# Altium PCB carte_balise_v100.PcbDoc
Units mil, origin at the board's own origin, x right, y up, seen from the top; angles counter-clockwise.
Board outline 3149.8 x 3149.8 mil, 2 copper layers (Top, Bottom), stack 61.811 mil thick; 87 components, 105 nets, 385 pads, 41 vias.
Unrouted connection lines stored in the file: 108.
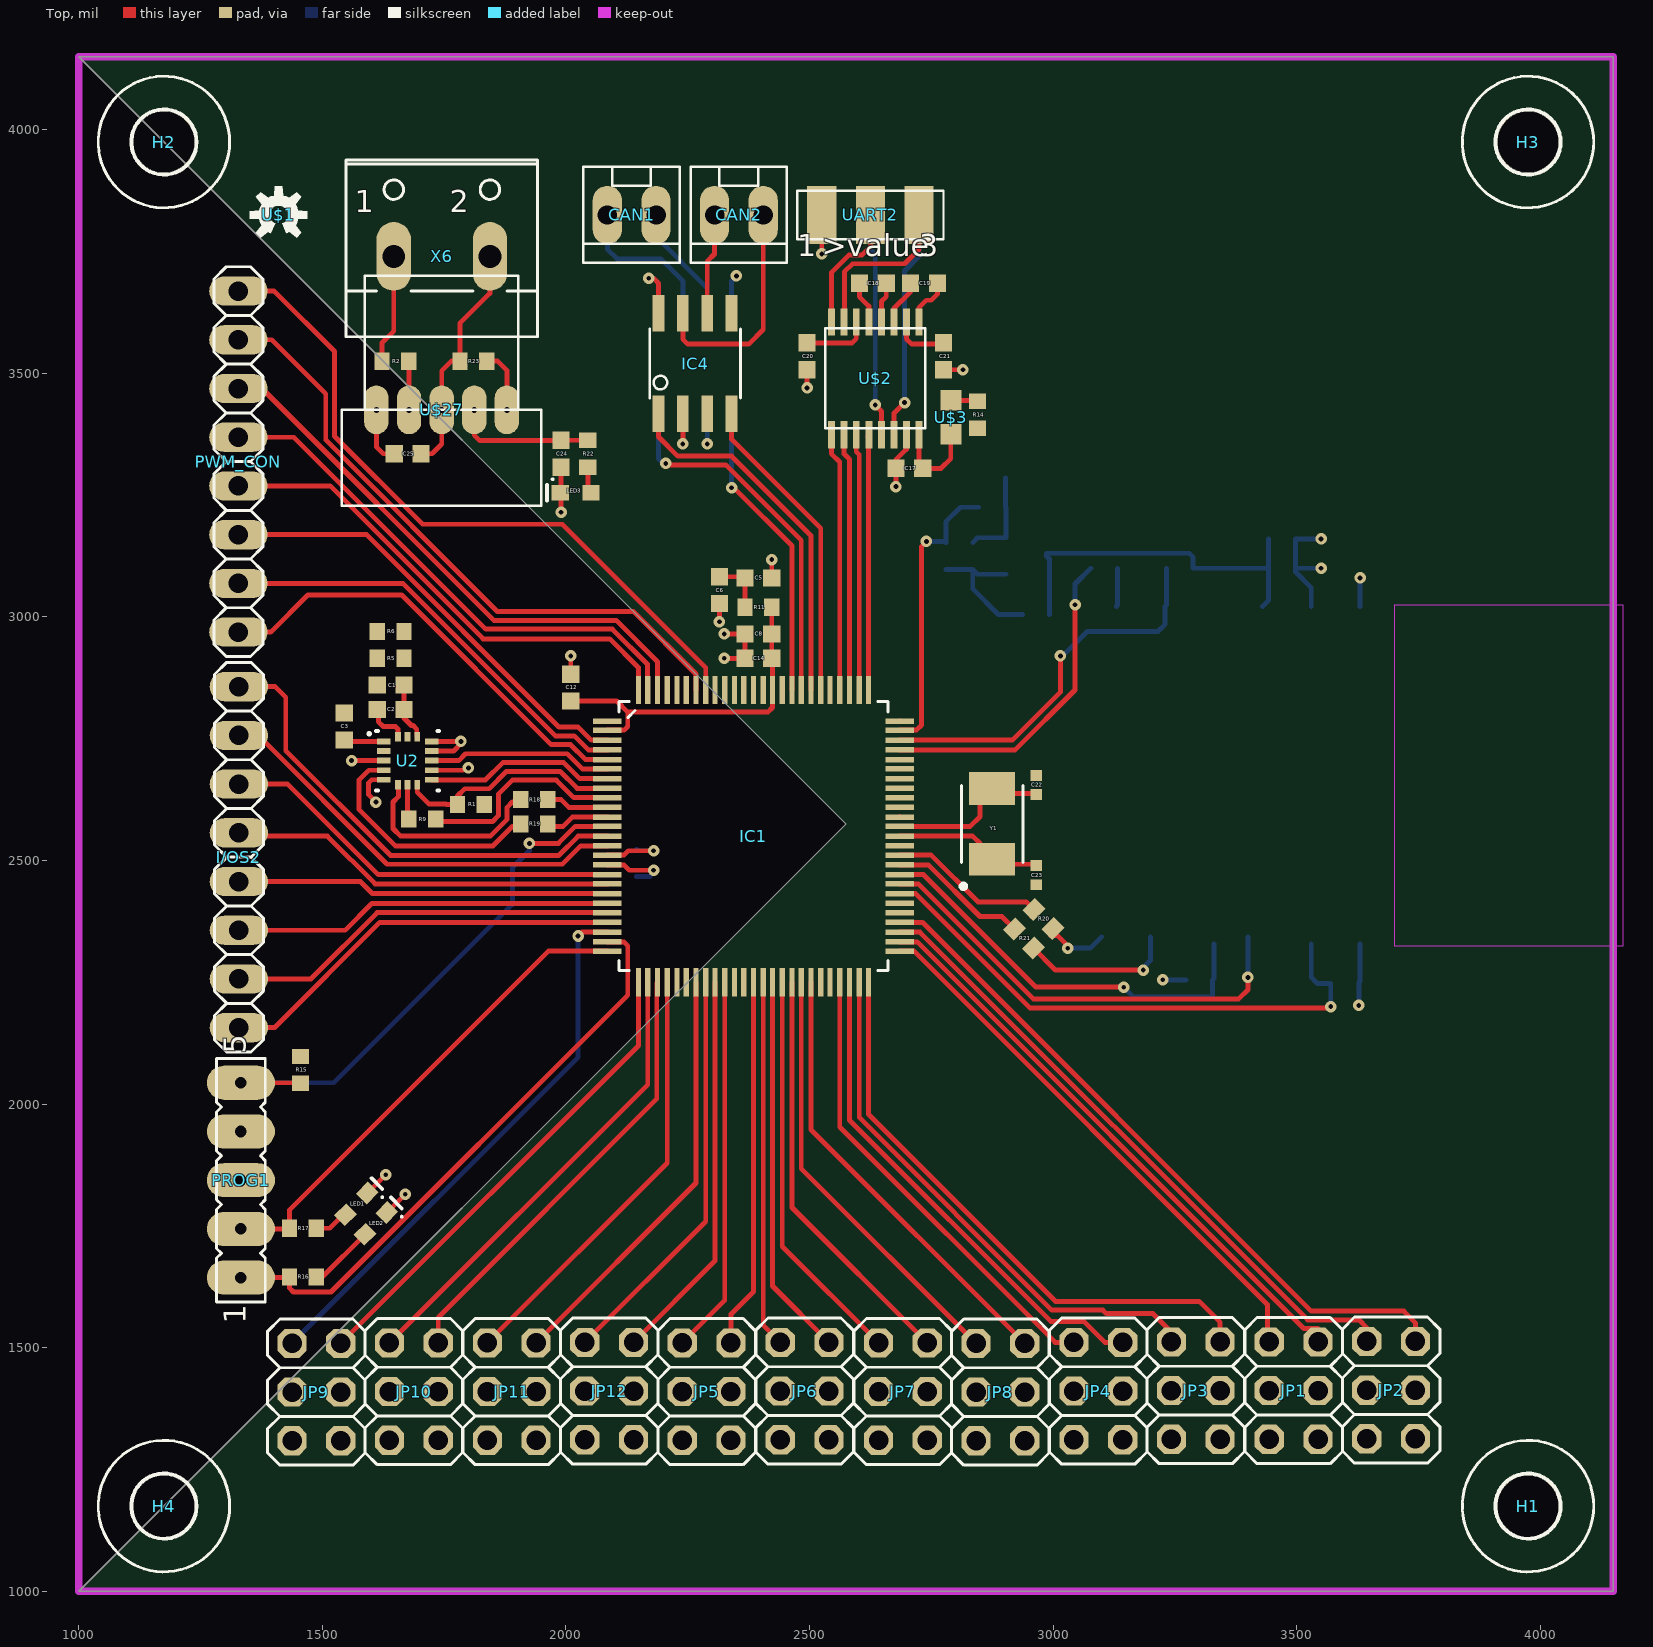
[diagram p0: Top view]
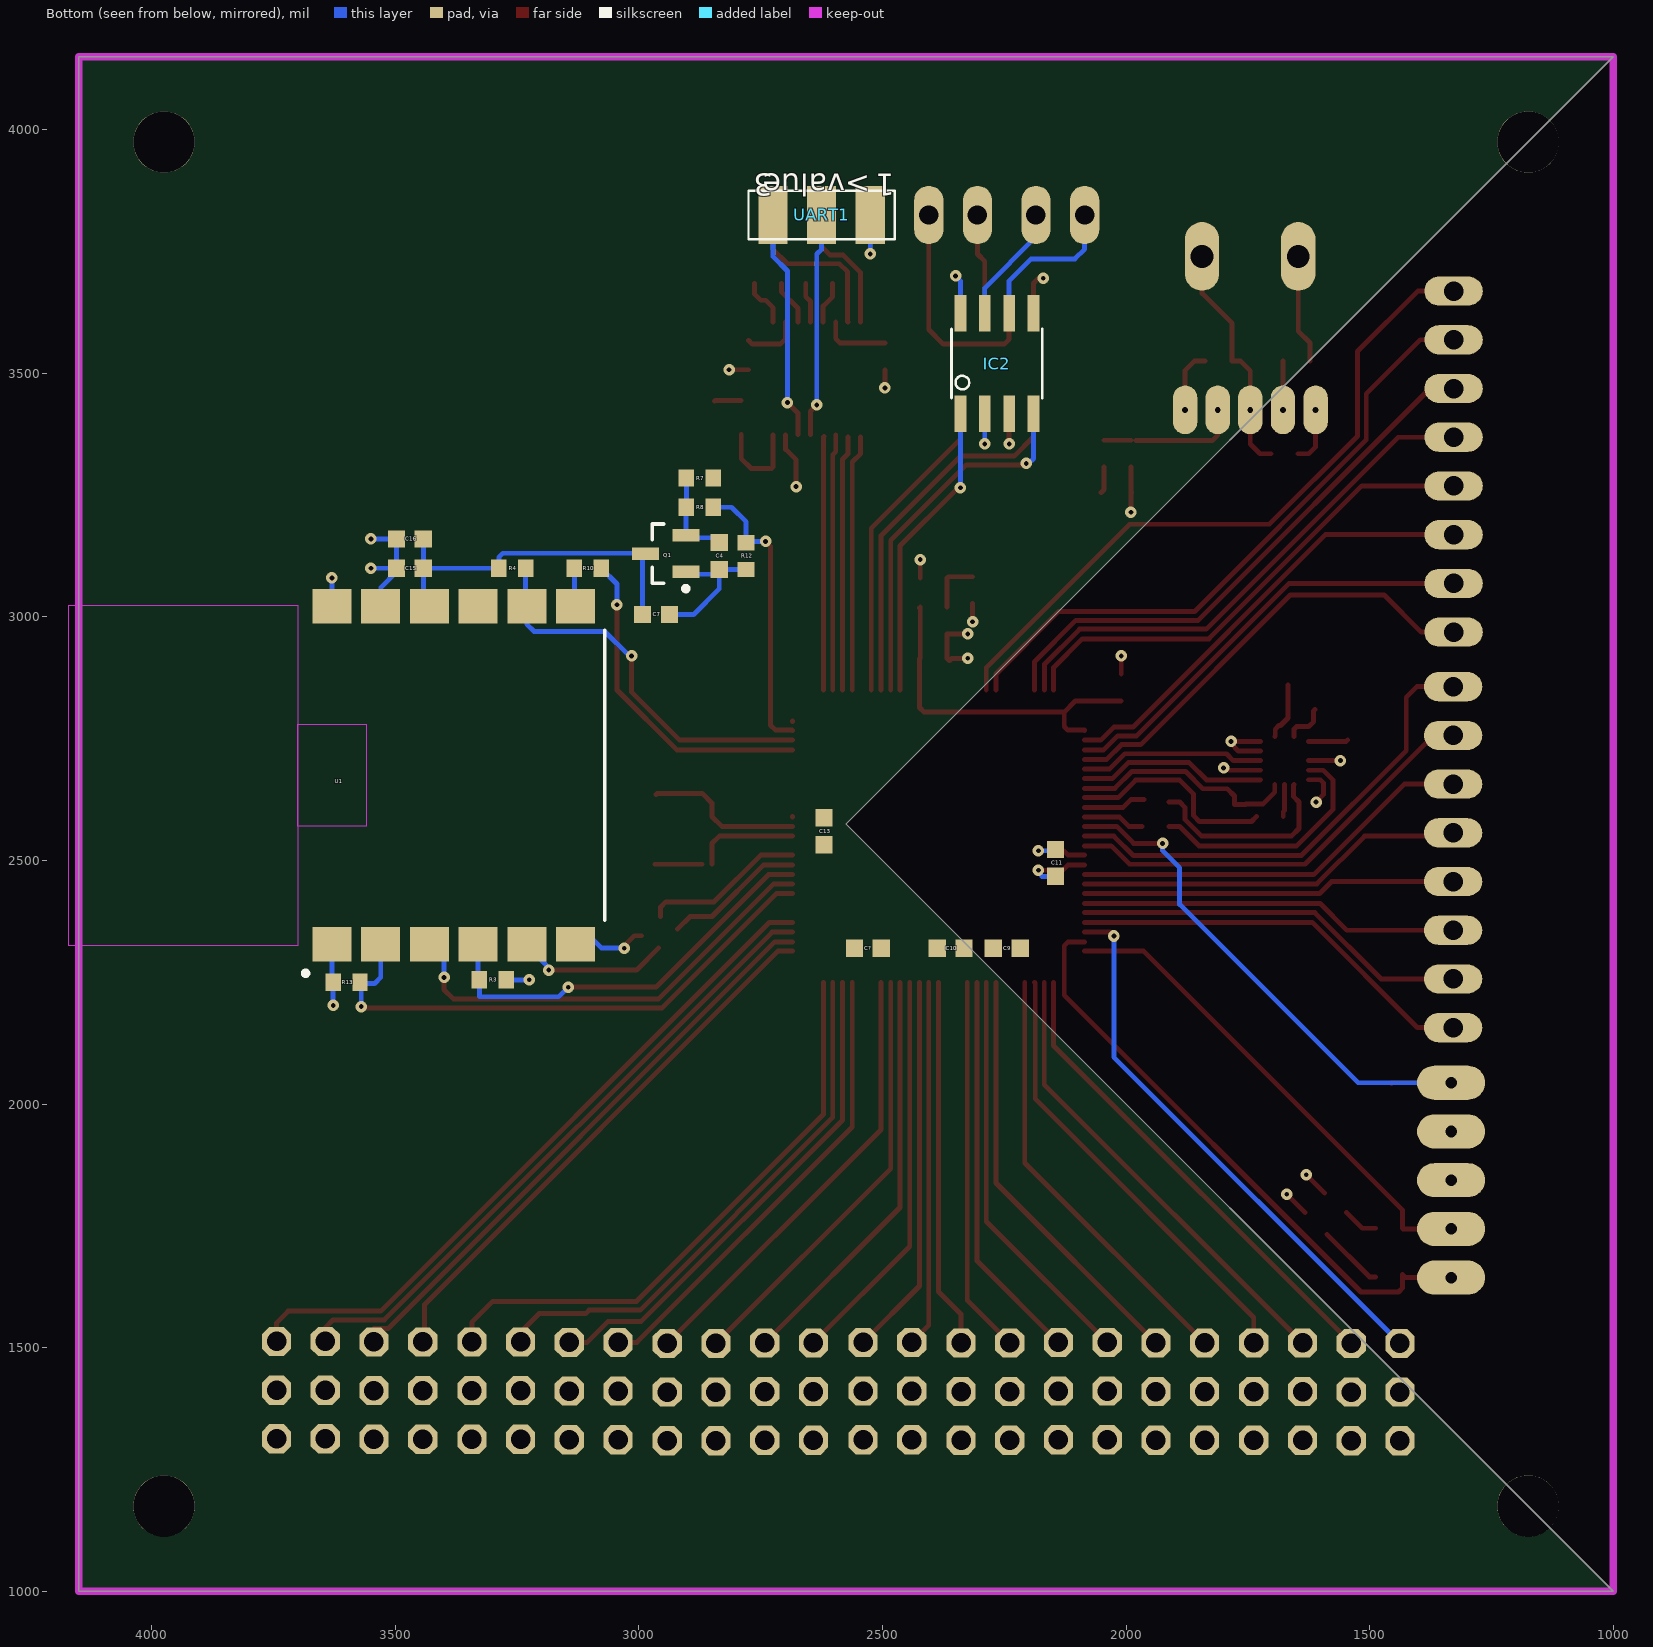
[diagram p1: Bottom view, seen from below]

## Layer stack, top to bottom
Top Solder: solder mask 0.4, Solder Resist, Dk 3.5
Top: signal copper 1.378
Dielectric 1: core 59.0551, FR-4, Dk 4.8
Bottom: signal copper 1.378
Bottom Solder: solder mask 0.4, Solder Resist, Dk 3.5

## Board outline
1000,1000 4149.8,1000 4149.8,4149.8 1000,4149.8 2574.8,2574.8

## Design rules (kind name [scope] priority, off if disabled: settings)
Clearance mdViaVia [IsVia vs IsVia] p1: gap=8
Clearance mdPadVia [IsPad vs IsVia] p2: gap=8
Clearance mdPadPad [IsPad vs IsPad] p3: gap=8
Clearance mdWireVia [(InLayerClass('Signal Layers') AND IsTrack) vs IsVia] p4: gap=8
Clearance mdWirePad [(InLayerClass('Signal Layers') AND IsTrack) vs IsPad] p5: gap=8
Clearance mdWireWire [(InLayerClass('Signal Layers') AND IsTrack) vs (InLayerClass('Signal Layers') AND IsTrack)] p6: gap=8
Clearance [All] p7: gap=8
HoleSize [All] p1: absolutevalues=TRUE maxlimit=100000 minlimit=24 maxpercent=80.000 minpercent=20.000
HoleToHoleClearance [All] p1: gap=8 allowstackedmicrovias=TRUE
PolygonConnect ThermalVias [IsVia] p1: connectstyle=Direct reliefconductorwidth=10 reliefentries=4 polygonreliefangle="90 Angle" airgapwidth=10
PolygonConnect [All] p2: connectstyle=Relief reliefconductorwidth=10 reliefentries=4 polygonreliefangle="90 Angle" airgapwidth=10
RoomDefinition carte_balise_v100 [InComponentClass('carte_balise_v100')] p1: confinementstyle=ConfineIn formatcopy=TRUE lockcomponents=FALSE outline 0,0 2000,0 2000,1000 0,1000
RoutingVias [All] p1: holewidth=28 width=50 viastyle="Through Hole" minholewidth=28 minwidth=50 maxholewidth=28 maxwidth=50
SilkToSilkClearance [All] p1 off: silktosilkclearance=10
SilkToSolderMaskClearance [IsPad] p1 off: minsilkscreentomaskgap=10 clearancetoexposedcopper=TRUE
SolderMaskExpansion [All] p1: expansion=4
Width [All] p1: maxlimit=100000 minlimit=10 preferedwidth=10
26 further rules are at their usual default settings.

## Components (designator, comment, footprint, x,y, rotation, side; value= is the part's Value field where it differs from the comment)
C1 "100n/0603" SMD_CA_0603_HD 1640,2860 r180 top
C2 "100n/0603" SMD_CA_0603_HD 1640,2810 r180 top
C3 "100n/0603" SMD_CA_0603_HD 1545,2775 r270 top
C4 "100n/0603" SMD_CA_0603_HD 2835,3125 r270 bottom
C5 "100n/0603" SMD_CA_0603_HD 2395,3080 r0 top
C6 "10u/6V3/0603" SMD_CA_0603_HD 2315,3055 r90 top
C7 "470n/16V/0603" SMD_CA_0603_HD 2965,3005 r180 bottom
C8 "100n/0603" SMD_CA_0603_HD 2395,2965 r0 top
C9 "100n/0603" SMD_CA_0603_HD 2245,2320 r180 bottom
C10 "100n/0603" SMD_CA_0603_HD 2360,2320 r0 bottom
C11 "100n/0603" SMD_CA_0603_HD 2145,2495 r270 bottom
C12 "100n/0603" SMD_CA_0603_HD 2010,2855 r270 top
C13 "100n/0603" SMD_CA_0603_HD 2620,2560 r270 bottom
C14 "100n/0603" SMD_CA_0603_HD 2395,2915 r0 top
C15 "100n/0603" SMD_CA_0603_HD 3470,3100 r0 bottom
C16 "10u/6V3/0603" SMD_CA_0603_HD 3470,3160 r180 bottom
C17 "100n/0603" SMD_CA_0603_HD 2705,3305 r0 top
C18 "100n/0603" SMD_CA_0603_HD 2630,3685 r0 top
C19 "100n/0603" SMD_CA_0603_HD 2735,3685 r0 top
C20 "100n/0603" SMD_CA_0603_HD 2495,3535 r90 top
C21 "100n/0603" SMD_CA_0603_HD 2775,3535 r90 top
C22 "22p/0402" SMD_CA_0402_HD 2965,2655 r90 top
C23 "22p/0402" SMD_CA_0402_HD 2965,2470 r270 top
C24 "4.7u/16V/0603" SMD_CA_0603_HD 1990,3335 r90 top
C25 "4.7u/16V/0603" SMD_CA_0603_HD 1675,3335 r180 top
C? "100n/0603" SMD_CA_0603_HD 2530,2320 r0 bottom
CAN1 "CONNECT_CAN" CONNECT_CAN 2135,3825 r90 top
CAN2 "CONNECT_CAN" CONNECT_CAN 2355,3825 r90 top
H1 "MOUNT-HOLE3.2" 3,2 3974.8,1174.8 r0 top
H2 "MOUNT-HOLE3.2" 3,2 1174.8,3974.8 r0 top
H3 "MOUNT-HOLE3.2" 3,2 3974.8,3974.8 r0 top
H4 "MOUNT-HOLE3.2" 3,2 1174.8,1174.8 r0 top
I/OS2 "PINHD-1X08_2.54" 1X08 1328.8,2506.8 r270 top
IC1 "DSPIC33EP512MU810-X_PF" TQFP100_14X14MC 2385,2550 r0 top
IC2 "MCP2551/SN" SO08 2265,3520 r180 bottom
IC4 "MCP2551/SN" SO08 2265,3520 r0 top
JP1 "PINHD-2X3" 2X03 3493.8,1411.8 r270 top
JP2 "PINHD-2X3" 2X03 3693.8,1412.8 r270 top
JP3 "PINHD-2X3" 2X03 3292.8,1411.8 r270 top
JP4 "PINHD-2X3" 2X03 3092.8,1410.8 r270 top
JP5 "PINHD-2X3" 2X03 2288.8,1409.8 r270 top
JP6 "PINHD-2X3" 2X03 2489.8,1410.8 r270 top
JP7 "PINHD-2X3" 2X03 2691.8,1409.8 r270 top
JP8 "PINHD-2X3" 2X03 2891.8,1408.8 r270 top
JP9 "PINHD-2X3" 2X03 1487.8,1408.8 r270 top
JP10 "PINHD-2X3" 2X03 1687.8,1409.8 r270 top
JP11 "PINHD-2X3" 2X03 1888.8,1409.8 r270 top
JP12 "PINHD-2X3" 2X03 2088.8,1410.8 r270 top
LED1 "0603" SDM_LED_0603 1570,1795 r45 top
LED2 "0603" SDM_LED_0603 1610,1755 r45 top
LED3 "0603" SDM_LED_0603 2020,3255 r180 top
PROG1 "FE05-1" FE05-1 1332.8,1843.8 r90 top
PWM_CON "PINHD-1X08_2.54" 1X08 1327.8,3318.8 r270 top
Q1 "DMP2035" SMD_TR_SOT23-3 2945,3130 r0 bottom
R1 "100k/0603" SMD_RE_0603_HD 1805,2615 r0 top
R2 "0R/0603" SMD_RE_0603_HD 1650,3525 r0 top
R3 "100k/0603" SMD_RE_0603_HD 3300,2255 r180 bottom
R4 "100k/0603" SMD_RE_0603_HD 3260,3100 r0 bottom
R5 "10R/0603" SMD_RE_0603_HD 1640,2915 r180 top
R6 "NE / 0603" SMD_RE_0603_HD 1640,2970 r180 top
R7 "0R/0603" SMD_RE_0603_HD 2875,3285 r180 bottom
R8 "10M/0603" SMD_RE_0603_HD 2875,3225 r180 bottom
R9 "33R/0603" SMD_RE_0603_HD 1705,2585 r180 top
R10 "33R/0603" SMD_RE_0603_HD 3105,3100 r0 bottom
R11 "10R/0603" SMD_RE_0603_HD 2395,3020 r180 top
R12 "100k/0603" SMD_RE_0603_HD 2780,3125 r90 bottom
R13 "10M/0603" SMD_RE_0603_HD 3600,2250 r180 bottom
R14 "0R/0603" SMD_RE_0603_HD 2845,3415 r270 top
R15 "10k/0603" SMD_RE_0603_HD 1455,2070 r90 top
R16 "100k/0603" SMD_RE_0603_HD 1460,1645 r180 top
R17 "100k/0603" SMD_RE_0603_HD 1460,1745 r180 top
R18 "33R/0603" SMD_RE_0603_HD 1935,2625 r0 top
R19 "33R/0603" SMD_RE_0603_HD 1935,2575 r0 top
R20 "33R/0603" SMD_RE_0603_HD 2980,2380 r315 top
R21 "33R/0603" SMD_RE_0603_HD 2940,2340 r315 top
R22 "330R/0603" SMD_RE_0603_HD 2045,3335 r90 top
R23 "79.3k/0603" SMD_RE_0603_HD 1810,3525 r0 top
U1 "MRF24J40MAT-I/RM" "SMD_MRF24J40MA -tight" 3700,2675 r90 bottom
U2 "ADXL362" SMD_IC_LGA_16 1675,2705 r0 top
U$1 "OSHW-LOGOS" OSHW-LOGO-S 1410,3825 r0 top
U$2 "SN75C3232_PW" PW16 2635,3490 r180 top
U$3 "L_603" 0603 2790,3410 r270 top
U$27 "PTR08100W" PTR08100W 1745,3425 r180 top
UART1 "CONNECT_3PINS_CMS" CON_2.54_3 2625,3825 r90 bottom
UART2 "CONNECT_3PINS_CMS" CON_2.54_3 2625,3825 r270 top
X6 "+12V" W237-102 1745,3790 r0 top
Y1 "TXC-7A-12MHz" SMD_OSC_5X3.2_2PINS 2875,2575 r90 top

## Footprints (in the part's own frame and the unit in brackets; to place one, negate y for a bottom-side part, rotate by r counter-clockwise, add the part's x,y. Pads: shape width x height; smd on the part's side, far side on the other; paste and mask are expansions set on the pad)
1X08 [mil] "1X08"
  oval 60x120 hole 40: 1(-350,0) 2(-250,0) 3(-150,0) 4(-50,0) 5(50,0) 6(150,0) 7(250,0) 8(350,0)
  silkscreen extent -400,-50 400,50
2X03 [mil] "2X03"
  oct 60x60 hole 40: 1(-100,-50) 2(-100,50) 3(0,-50) 4(0,50) 5(100,-50) 6(100,50)
  silkscreen extent -150,-100 150,100
3,2 [mil] "3,2"
  round 126 hole 126: 1(0,0)
  silkscreen extent -135,-135 135,135
0603 [mil] "0603"
  rect 42x43 smd: 1(-34.45,0) 2(35,0)
CON_2.54_3 [mil] "CON_2.54_3"
  rect 120x60 smd: P$1(0,-100) P$2(0,0) P$3(0,100)
  silkscreen extent -50,-150 50,150
CONNECT_CAN [mil] "CONNECT_CAN"
  oval 120x60 hole 40: _H(0,-50) _L(0,50)
  silkscreen extent -98,-98 99,99
FE05-1 [mil] "FE05-1"
  oval 70x140 hole 24: 1(-200,0) 2(-100,0) 3(0,0) 4(100,0) 5(200,0)
  silkscreen extent -250,-50 250,50
OSHW-LOGO-S [mil] "OSHW-LOGO-S"
  silkscreen extent -59,-47 59,59
PTR08100W [mil] "PTR08100W"
  oval 50x100 hole 12: P$1(134,0) P$2(67,0) P$3(0,0) P$4(-66.93,0) P$5(-133.86,0)
  silkscreen extent -205,-276 205,197
PW16 [mil] "PW16"
  rect 14x56 smd: P$1(-89.57,-115.16) P$2(-63.98,-115.16) P$3(-38.39,-115.16) P$4(-12.8,-115.16) P$5(13,-115.16) P$6(39,-115.16) P$7(64,-115.16) P$8(90,-115.16) P$9(90,116) P$10(64,116) P$11(39,116) P$12(13,116) P$13(-12.8,116) P$14(-38.39,116) P$15(-63.98,116) P$16(-89.57,116)
  silkscreen extent -102,-102 103,103
SDM_LED_0603 [mm] "LED 2-Leads, Body 1,70x0,80mm, IPC High Density"
  rect 0.9x0.8 smd: 1(-0.8,0) 2(0.8,0)
  silkscreen extent 1.15,-0.75 1.5,0.4, body extent -0.9,-0.45 0.9,0.45, height 0.68
SMD_CA_0402_HD [mm] "Chip Capacitor, 2-Leads, Body 1,00x0,50mm, IPC High Density"
  rect 0.56x0.6 smd: 1(-0.5,0) 2(0.5,0)
  body extent -0.53,-0.28 0.53,0.27, height 0.55
SMD_CA_0603_HD [mm] "Chip Capacitor, 2-Leads, Body 1,60x0,80mm, IPC High Density"
  rect 0.9x0.9 smd: 1(-0.7,0) 2(0.7,0)
  body extent -0.85,-0.45 0.85,0.45, height 0.9
SMD_IC_LGA_16 [mm] "LGA, 16-Leads, Body 3.22x3.00mm, Pitch 0.50mm, IPC High Density"
  rect 0.7x0.3 smd: 1(-1.25,1) 2(-1.25,0.5) 3(-1.25,0) 4(-1.25,-0.5) 5(-1.25,-1) 9(1.25,-1) 10(1.25,-0.5) 11(1.25,0) 12(1.25,0.5) 13(1.25,1)
  rect 0.3x0.5 smd: 6(-0.5,-1.25) 7(0,-1.25) 8(0.5,-1.25) 14(0.5,1.25) 15(0,1.25) 16(-0.5,1.25)
  silkscreen extent -2.07,-1.55 1.65,1.55, body extent -1.65,-1.55 1.65,1.55, height 1.14
"SMD_MRF24J40MA -tight" [mil] "SM Module; 12 Leads; Body 27.9x17.8x1.7mm (LxWxH), Microchip"
  rect 70.87x80 smd mask+2: 1(-346.46,-70) 2(-346.46,-170) 3(-346.46,-270) 4(-346.46,-370) 5(-346.46,-470) 6(-346.46,-570) 7(346.46,-570) 8(346.46,-470) 9(346.46,-370) 10(346.46,-270) 11(346.46,-170) 12(346.46,-70)
  Top keep-out region: -105,0 105,0 105,-140 -105,-140
  Keep-Out Layer region: -350.39,470.47 349.41,470.47 349.41,0 -350.39,0
  silkscreen extent -411,-630 298,-11, body extent -350,-630 350,470, height 67
SMD_OSC_5X3.2_2PINS [mm] "2-pin, 5x3.2mm smd"
  rect 1.7x2.4 smd: 1(-1.85,0) 2(1.85,0)
  Document keep-out lines w0.1: -2.5,1.6 2.5,1.6
  silkscreen extent -3.37,-1.6 2.01,1.62, body extent -2.5,-1.6 2.5,1.6, height 1.35
SMD_RE_0603_HD [mm] "Chip Resistor, 2-Leads, Body 1,57x0,85mm, IPC High Density"
  rect 0.8x0.9 smd: 1(-0.7,0) 2(0.7,0)
  body extent -0.83,-0.48 0.82,0.48, height 0.5
SMD_TR_SOT23-3 [mm] "SOT23, 3-Leads, Body 3.1x2.7mm (max), Pitch 0,95mm"
  rect 1.4x0.65 smd: 1(-1.05,0.95) 2(-1.05,-0.95) 3(1.05,0)
  silkscreen extent -1.17,-1.55 0.7,1.95, body extent -1.24,-1.45 1.24,1.47, height 1
SO08 [mil] "SO08"
  rect 24x75 smd: 1(-75,-103) 2(-25,-103) 3(25,-103) 4(75,-103) 5(75,103) 6(25,103) 7(-25,103) 8(-75,103)
  silkscreen extent -93,-71 93,71
TQFP100_14X14MC [mil] "TQFP100_14X14MC"
  rect 58x11 smd: 1(-300,236) 2(-300,217) 3(-300,197) 4(-300,177) 5(-300,157) 6(-300,138) 7(-300,118) 8(-300,98) 9(-300,79) 10(-300,59) 11(-300,39) 12(-300,20) 13(-300,0) 14(-300,-20) 15(-300,-39) 16(-300,-59) 17(-300,-79) 18(-300,-98) 19(-300,-118) 20(-300,-138) 21(-300,-157) 22(-300,-177) 23(-300,-197) 24(-300,-217) 25(-300,-236) 51(300,-236) 52(300,-217) 53(300,-197) 54(300,-177) 55(300,-157) 56(300,-138) 57(300,-118) 58(300,-98) 59(300,-79) 60(300,-59) 61(300,-39) 62(300,-20) 63(300,0) 64(300,20) 65(300,39) 66(300,59) 67(300,79) 68(300,98) 69(300,118) 70(300,138) 71(300,157) 72(300,177) 73(300,197) 74(300,217) 75(300,236)
  rect 11x58 smd: 26(-236,-300) 27(-217,-300) 28(-197,-300) 29(-177,-300) 30(-157,-300) 31(-138,-300) 32(-118,-300) 33(-98,-300) 34(-79,-300) 35(-59,-300) 36(-39,-300) 37(-20,-300) 38(0,-300) 39(20,-300) 40(39,-300) 41(59,-300) 42(79,-300) 43(98,-300) 44(118,-300) 45(138,-300) 46(157,-300) 47(177,-300) 48(197,-300) 49(217,-300) 50(236,-300) 76(236,300) 77(217,300) 78(197,300) 79(177,300) 80(157,300) 81(138,300) 82(118,300) 83(98,300) 84(79,300) 85(59,300) 86(39,300) 87(20,300) 88(0,300) 89(-20,300) 90(-39,300) 91(-59,300) 92(-79,300) 93(-98,300) 94(-118,300) 95(-138,300) 96(-157,300) 97(-177,300) 98(-197,300) 99(-217,300) 100(-236,300)
  silkscreen extent -276,-276 276,276
W237-102 [mil] "W237-102"
  oval 70.5x141 hole 47: 1(-98.43,-50) 2(99,-50)
  silkscreen extent -196,-215 197,148

## Part data
C1 C2 C3 C4 C5 C8 C9 C10 C11 C12 C13 C14 C15 C17 C18 C19 C20 C21 C?: library part "?? SMD 0603", "Capacitor - 0603 SMD"
C6 C16: library part "10uF/6V3 X5R SMD 0603", "Capacitor - 10uF 6.3V 20% X5R (ESR<1R) 0603 SMD"
C7: library part "470n/16V X7R SMD 0603", "Capacitor - 470nF 16V X7R 10% 0603 SMD"
C22 C23: library part "24p/50V NPO SMD 0402", "Capacitor - 24p 50V 5% NPO 0402 SMD"
C24 C25: library part "4.7uF/16V X5R SMD 0603", "Capacitor - 4.7uF 16V 20% X5R (ESR<1R) 0603 SMD"
CAN1 CAN2: "<b>Connecteur CAN</b> (club robot)<p> / Utilisé pour relier le cable de liaison CAN. Mais peut également être utilisé comme un connecteur à 2 broches (le pas est standard) pour des capteurs par exemple."
H1 H2 H3 H4: "<b>MOUNTING HOLE</b> with drill center marker"
I/OS2 JP1 JP2 JP3 JP4 JP5 JP6 JP7 JP8 JP9 JP10 JP11 JP12 PWM_CON: "<b>PIN HEADER</b>"
IC1: "dsPIC33EP512MU810-X_PF TQFP100 14x14"
IC2 IC4: "<b>High-Speed CAN Transceiver</b>"
LED1 LED2 LED3: library part "NE_LED 0603", "Not Equipe"
PROG1: "<b>FEMALE HEADER</b>"
Q1: library part DMP2035U_P_MOS, "P-CHANNEL ENHANCEMENT MODE MOSFET"
R1 R3 R4 R5 R8 R9 R10 R11 R12 R13 R15 R16 R17 R18 R19 R20 R21 R22 R23: library part "?? SMD R 0603", "Resistor - 0603 ??? SMD"
R2 R6 R7 R14: library part "0R ERJ-3GEY0R00V SMD R 0603", "Resistor - 0R 1%  0603 SMD"
U1: library part MRF24J40MAT-I, "IC ZIGBEE 2.4 GHz IEEE Std. 802.15.4, RF Transceiver 12- Pin Module SMD"
U2: "Digital Output MEMS Accelerometer"
U$1: "<b>Open Source Hardware Logo</b> This logo indicates the piece of hardware it is found on incorporates a OSHW license and/or adheres to the definition of open source hardware found here: http://freedomdefined.org/OSHW"
UART1 UART2: "<b>Connecteur à 3 broches</b> (club robot)<p> / Utilisé principalement pour les capteurs ou les servomoteurs."
X6: library part W237-102, "<b>WAGO SCREW CLAMP</b>"
Y1: library part TXC_7A-12.000MAAJ-T, "Crystal Quartz 12MHz, 30ppm, TXC serie-7A, 18pF, 5x3.2mm SMD"

## Via types
v1: diameter 23.62, hole 9.84, Top to Bottom, tented both sides, 41 vias

## Nets (pads, with @x,y where several pads share a name; then routed paths per layer and width w, separated by ;. In a path a pad name is that pad's centre, name@x,y a point inside that pad or via, vN(x,y) a via of type N, cw(c..) or ccw(c..) an arc to the next point about the centre after c; other vN are vias at no path point)
3V3_ADXL_EN: R5.2
+3V3: C5.1 C6.2 C24.2 IC2.3 IC4.3 JP1.5 JP1.6 JP2.5 JP2.6 JP3.5 JP3.6 JP4.5 JP4.6 JP5.5 JP5.6 JP6.5 JP6.6 JP7.5 JP7.6 JP8.5 JP8.6 JP9.5 JP9.6 JP10.5 JP10.6 JP11.5 JP11.6 JP12.5 JP12.6 PROG1.4 R6.2 R7.2 R11.2 R14.2 R22.2 U$27.P$4 | length 392.5
  Top w10: U$27.P$4 1811.93,3373.07 1823,3362 C24.2@1979.44,3362 ; C24.2 R22.2 ; C6.2 2364.88,3082.56 C5.1 R11.2
+12V: R2.2 U$27.P$2 | length 100.2
  Top w10: R2.2 1677.56,3425.44 U$27.P$2
A\D\X\L\_\C\S\: IC1.8 R1.1 U2.8 | length 469.2
  Top w10: U2.8 1694.69,2640.31 1719.28,2615.72 1753.69,2615.72 1754.41,2615 R1.1 1777.44,2632.44 1792.19,2647.19 1842.19,2647.19 1878,2683 1987.91,2683 2022.91,2648 IC1.8
ADXL_INT1: IC1.6 U2.11 | length 379.4
  Top w10: U2.11 1779.91,2705 1793.91,2719 2002.82,2719 2033.82,2688 IC1.6
ADXL_INT2: IC1.7 U2.9 | length 389.5
  Top w10: U2.9 1724.65,2665.19 1834.73,2665.19 1870.54,2701 1995.37,2701 2028.37,2668 IC1.7
ADXL_MISO: IC1.9 R9.1 | length 432.7
  Top w10: R9.1@1732.56,2590 1742.56,2580 1849.41,2580 1861.31,2591.9 1861.31,2636.31 1890,2665 1980.46,2665 2016.46,2629 IC1.9
ADXL_MOSI: R18.1 U2.6 | length 412.6
  Top w10: U2.6 1656.09,2655.01 1656.09,2631.09 1645,2620 1645,2565.59 1660.59,2550 1844.86,2550 1879.31,2584.44 1879.31,2609.31 1890,2620 R18.1@1912.44,2620
ADXL_SCLK: R19.1 U2.4 | length 504.3
  Top w10: U2.4 1595.32,2685.32 1575,2665 1575,2604.91 1649.91,2530 1850,2530 1852,2532 1852.32,2532 1890.32,2570 R19.1@1912.44,2570
BAT_LEVEL_MEAS: IC1.1
CAN1_RX: IC1.83 IC2.4 | length 761.6
  Top w10: v1(2205,3315) 2207.81,3312.19 2327.9,3312.19 2483,3157.09 IC1.83
  Bottom w10: IC2.4 2190,3325 2200,3315 v1(2205,3315)
CAN1_TX: IC1.84 IC2.1 | length 619.2
  Top w10: v1@2340,3260 2350,3260 2464,3146 IC1.84
  Bottom w10: v1(2340,3265) IC2.1
CAN2_RX: IC1.81 IC4.4 | length 642.8
  Top w10: IC4.4 2340,3365 2523,3182 IC1.81
CAN2_TX: IC1.82 IC4.1 | length 761.1
  Top w10: IC4.1 2190,3369.91 2229.72,3330.19 2339.81,3330.19 2503,3167 IC1.82
GND: C1.2 C2.2 C3.1 C5.2 C6.1 C8.1 C9.1 C10.1 C11.1 C12.1 C13.1 C14.1 C15.2 C16.1 C17.1 C20.1 C21.1 C22.2 C23.2 C24.1 C25.1 C?.1 IC1.15 IC1.31 IC1.36 IC1.45 IC1.65 IC1.75 IC2.2 IC2.8 IC4.2 IC4.8 JP1.3 JP1.4 JP2.3 JP2.4 JP3.3 JP3.4 JP4.3 JP4.4 JP5.3 JP5.4 JP6.3 JP6.4 JP7.3 JP7.4 JP8.3 JP8.4 JP9.3 JP9.4 JP10.3 JP10.4 JP11.3 JP11.4 JP12.3 JP12.4 LED1.2 LED2.2 LED3.2 PROG1.3 R13.1 R23.1 U1.1 U1.11 U1.12 U2.3 U2.5 U2.10 U2.12 U2.13 U2.16 U$2.P$15 U$27.P$3 UART1.P$1 UART2.P$1 X6.2 | length 2594.5
  Top w10: v1(1560,2705) U2.3 ; LED1.2 v1(1630,1855) ; v1(1610,2620) 1595,2635 1595,2659.54 1601.09,2665.63 U2.5 ; C2.2 1615,2807.44 1615,2785 1625,2775 1650,2775 1655.32,2769.68 U2.16 ; LED2.2 v1(1670,1815) ; C25.1 1725,3335 1745,3355 U$27.P$3 1745,3505 1765,3525 R23.1 1782.44,3602.44 1844,3664 X6.2 ; U2.10 1790.32,2685.32 1795,2690 v1(1800,2690) ; U2.12 1769.69,2724.69 1784.37,2739.37 v1(1784.37,2744.37) U2.13 ; v1(1990,3215) 1990,3253.5 LED3.2 1990,3256.5 C24.1 ; C12.1 v1(2010,2920) ; IC1.15 2085.5,2511.5 2119.38,2511.5 2127.88,2520 v1(2180,2520) ; v1(2170,3695) 2180,3695 2190,3685 IC4.8 ; v1@2240,3365 IC4.2 ; v1(2315,2990) C6.1 ; v1(2325,2915) 2357.44,2915 2362.44,2910 C14.1 C8.1 v1(2325,2965) ; C5.2 v1(2422.56,3117.56) ; v1(2495,3470) C20.1 ; v1(2525,3745) UART2.P$1 ; v1(2677.44,3267.44) C17.1 2677.44,3322.44 2698.98,3343.98 U$2.P$15 ; IC1.65 IC1.65@2685,2590.5 ; IC1.75@2685,2785.5 IC1.75 ; C21.1 v1(2815,3507.44)
  Bottom w10: C11.1 2147.56,2520 v1(2180,2520) ; v1(2290,3355) IC2.2 ; IC2.8 2340,3690 v1(2350,3700) ; v1(2525,3745) UART1.P$1 ; U1.11 3530,3060 3497.56,3092.44 C15.2 ; v1(3550,3100) C15.2 ; v1(3550,3160) C16.1 C15.2 ; v1(3627.56,2202.44) R13.1 3630,2252.44 U1.1 ; U1.12 v1(3630,3080)
  other v1: 2240,3355
M\C\L\R\: IC1.12 PROG1.5 R15.1 | length 1145.6
  Top w10: PROG1.5 1453.64,2043.8 R15.1 ; v1(1925,2535) 1984.54,2535 2019.54,2570 IC1.12
  Bottom w10: PROG1.5 1523.8,2043.8 1890,2410 1890,2485 1925,2520 v1(1925,2535)
NetC1_1: C1.1 C2.1 C3.2 R1.2 R5.1 R6.1 U2.1 U2.14 | length 201
  Top w10: C3.2 1548.07,2744.37 U2.1 ; C1.1 C2.1 1667.56,2792.44 1682.95,2777.05 1686.29,2777.05 1693.91,2769.44 1693.91,2754.99 U2.14
NetC4_1: C4.1 Q1.2 R7.1 R8.1 | length 195.8
  Bottom w10: C4.1 2844.84,3162.4 2903.66,3162.4 2903.66,3223.9 R8.1 R7.1
NetC4_2: C4.2 C7.2 Q1.1 R12.1 | length 291.8
  Bottom w10: R12.1 C4.2 ; Q1.1@2903.66,3087.6 2844.84,3087.6 C4.2 ; C7.2 2887.56,3005 2835,3057.56 C4.2
NetC17_2: C17.2 U$2.P$16 U$3.2 | length 186
  Top w10: U$2.P$16 2724.57,3307.99 C17.2@2727.56,3305 ; C17.2 2770,3305 2790,3325 U$3.2
NetC18_1: C18.1 U$2.P$5 | length 87.9
  Top w10: C18.1 2602.44,3657.56 2622,3638 U$2.P$5
NetC18_2: C18.2 U$2.P$4 | length 83.9
  Top w10: U$2.P$4 2647.8,3647.8 2657.56,3657.56 C18.2
NetC19_1: C19.1 U$2.P$3 | length 93.9
  Top w10: U$2.P$3 2673.39,3633.39 2707.44,3667.44 C19.1
NetC19_2: C19.2 U$2.P$1 | length 101.4
  Top w10: U$2.P$1 2724.57,3634.57 2740,3650 2750,3650 2762.56,3662.56 C19.2
NetC20_2: C20.2 U$2.P$6 | length 138.7
  Top w10: C20.2 2587.56,3562.56 2596,3571 U$2.P$6
NetC21_2: C21.2 U$2.P$2 | length 117.9
  Top w10: U$2.P$2 2698.98,3571.02 2710,3560 2767.44,3560 C21.2@2775,3567.56
NetC22_1: C22.1 IC1.64 Y1.2 | length 325.4
  Top w10: IC1.64 2830,2570 2850,2590 2850,2617.83 2870,2637.83 2962.48,2637.83 C22.1
NetC23_1: C23.1 IC1.63 Y1.1 | length 311.6
  Top w10: IC1.63 2835,2550 2850,2535 Y1.1@2850,2492.17 ; Y1.1@2870,2492.17 C23.1@2967.52,2492.17
NetC25_2: C25.2 U$27.P$1 | length 118.2
  Top w10: U$27.P$1 1611,3349 1625,3335 C25.2
NetCAN1__H: CAN1._H IC2.7 | length 245.5
  Bottom w10: CAN1._H 2185,3780 2290,3675 IC2.7
NetCAN1__L: CAN1._L IC2.6 | length 318.9
  Bottom w10: CAN1._L 2085,3755 2105,3735 2195,3735 2240,3690 IC2.6
NetCAN2__H: CAN2._H IC4.7 | length 469.6
  Top w10: IC4.7 2240,3570 2250,3560 2375,3560 2405,3590 CAN2._H
NetCAN2__L: CAN2._L IC4.6 | length 208.2
  Top w10: IC4.6 2290,3730 2305,3745 CAN2._L
NetIC1_10: IC1.10 R18.2 | length 129.1
  Top w10: R18.2 1990,2625 2006,2609 IC1.10
NetIC1_11: IC1.11 R19.2 | length 125.3
  Top w10: R19.2@1967.56,2570 1994.09,2570 2013.09,2589 IC1.11
NetIC1_60: IC1.60 R21.1 | length 290
  Top w10: IC1.60 2744,2491 2850,2385 2895,2385 R21.1
NetIC1_61: IC1.61 R20.1 | length 334.6
  Top w10: IC1.61 2749.91,2511 2845.91,2415 2945,2415 2955.51,2404.49 R20.1@2955.51,2384.49
NetLED1_1: LED1.1 R17.1 | length 73.7
  Top w10: R17.1 1515,1745 LED1.1@1547.73,1777.73
NetLED2_1: LED2.1 R16.1 | length 136.5
  Top w10: R16.1 1500,1645 LED2.1
NetLED3_1: LED3.1 R22.1 | length 55.1
  Top w10: R22.1 2045,3261.5 LED3.1
NetR2_1: R2.1 X6.1 | length 225
  Top w10: R2.1 1622.44,3562.44 1646.57,3586.57 X6.1
NetR9_2: R9.2 U2.7 | length 66.8
  Top w10: U2.7 1675,2602.44 1677.44,2600 R9.2@1677.44,2590
NetR10_2: R10.2 U1.7 | length 79.6
  Bottom w10: U1.7 3132.56,3024.02 R10.2
NetR14_1: R14.1 U$3.1 | length 55.8
  Top w10: U$3.1 2843.11,3444.45 R14.1
NetR23_2: R23.2 U$27.P$5 | length 130.3
  Top w10: R23.2 1860,3525 1878.86,3506.14 U$27.P$5
NetU$2_P$7: U$2.P$7 UART2.P$3 | length 345.9
  Top w10: U$2.P$7 2571.72,3605.88 2571.72,3708.1 2588.62,3725 2695,3725 2725,3755 UART2.P$3
NetU$2_P$8: U$2.P$8 UART2.P$2 | length 268.7
  Top w10: U$2.P$8 2545,3706.83 2581.17,3743 2608,3743 2625,3760 UART2.P$2
NetU$2_P$13: U$2.P$13 UART1.P$2 | length 460.4
  Top w10: v1(2635,3435) 2647.8,3422.2 U$2.P$13
  Bottom w10: UART1.P$2 2625,3755 2635,3745 v1(2635,3435)
NetU$2_P$14: U$2.P$14 UART1.P$3 | length 472.4
  Top w10: U$2.P$14 2673.39,3418.39 v1(2695,3440)
  Bottom w10: v1(2695,3440) 2695,3710 2725,3740 UART1.P$3
PGEC/RX: IC1.24 PROG1.1 R16.2 | length 1246.3
  Top w10: PROG1.1@1346.61,1630 PROG1.1 1426.24,1643.8 1432.44,1650 1432.44,1622.56 1440.72,1614.28 1517.83,1614.28 2127,2223.46 2127,2324.88 2119.38,2332.5 2085.5,2332.5 IC1.24
PGED/TX: IC1.25 PROG1.2 R17.2 | length 1010.4
  Top w10: PROG1.2 1431.24,1743.8 R17.2 1432.44,1782.44 1910.19,2260.19 1910.28,2260.19 1924.81,2274.72 1924.81,2274.81 1964,2314 IC1.25
PIC_RA0: I/OS2.2 IC1.14 | length 881.5
  Top w10: I/OS2.2 1368.2,2756.8 1632.81,2492.19 1992.64,2492.19 2030.46,2530 IC1.14
PIC_RA1: IC1.35 JP5.1 | length 776.3
  Top w10: JP5.1 2326,1597 IC1.35
PIC_RA2: IC1.51 JP1.1 | length 1133.9
  Top w10: IC1.51 2714.63,2314 3440,1588.63 3440,1515.61 JP1.1
PIC_RA3: IC1.52 JP1.2 | length 1214.9
  Top w10: IC1.52 2721.09,2333 3515.09,1539 3543.8,1539 JP1.2
PIC_RA4: IC1.53 JP2.1 | length 1323.5
  Top w10: IC1.53 2726.54,2353 3522.54,1557 3628,1557 3643.8,1541.2 JP2.1
PIC_RA5: IC1.54 JP2.2 | length 1437.6
  Top w10: IC1.54 2732,2373 3530,1575 3720,1575 3743.8,1551.2 JP2.2
PIC_RA9: IC1.27 JP10.1 | length 959.8
  Top w10: JP10.1 2168,2040 IC1.27
PIC_RA10: IC1.28 JP10.2 | length 926.7
  Top w10: JP10.2 1737.8,1561.87 2186.5,2010.57 2186.5,2248.5 IC1.28
PIC_RB2: I/OS2.8 IC1.22 | length 845.7
  Top w10: I/OS2.8 1401.8,2156.8 1618,2373 IC1.22
PIC_RB3: I/OS2.7 IC1.21 | length 812.6
  Top w10: I/OS2.7 1476.35,2256.8 1612.54,2393 IC1.21
PIC_RB4: I/OS2.6 IC1.20 | length 779.1
  Top w10: I/OS2.6 1546.8,2356.8 1602,2412 IC1.20
PIC_RB5: I/OS2.5 IC1.19 | length 766.5
  Top w10: I/OS2.5 1578.2,2456.8 1603,2432 IC1.19
PIC_RB6: IC1.23 JP9.1 | length 1142.7
  Top w10: v1(2025,2345) 2033,2353 IC1.23
  Bottom w10: JP9.1 2025,2096 v1(2025,2345)
PIC_RB7: IC1.26 JP9.2 | length 994.4
  Top w10: JP9.2 2149,2120 IC1.26
PIC_RB8: IC1.29 JP11.1 | length 893.1
  Top w10: JP11.1 2208,1879 IC1.29
PIC_RB9: IC1.32 JP11.2 | length 876.1
  Top w10: JP11.2 2267,1838 IC1.32
PIC_RB10: IC1.33 JP12.1 | length 842
  Top w10: JP12.1 2287,1759 IC1.33
PIC_RB11: IC1.34 JP12.2 | length 808.5
  Top w10: JP12.2 2306,1678 IC1.34
PIC_RB12: IC1.40 JP6.2 | length 787.2
  Top w10: IC1.40 2424,1626.61 JP6.2
PIC_RB13: IC1.41 JP7.1 | length 822.1
  Top w10: IC1.41 2444,1707.61 JP7.1
PIC_RB14: IC1.42 JP7.2 | length 855.3
  Top w10: IC1.42 2464,1787.61 JP7.2
PIC_RB15: IC1.43 JP8.1 | length 889.8
  Top w10: IC1.43 2483,1867.61 JP8.1
PIC_RD14: IC1.44 JP8.2 | length 923
  Top w10: IC1.44 2503,1947.61 JP8.2
PIC_RE8: I/OS2.3 IC1.17 | length 833.2
  Top w10: I/OS2.3 1429.11,2656.8 1614.91,2471 IC1.17
PIC_RE9: I/OS2.4 IC1.18 | length 799.6
  Top w10: I/OS2.4 1335.61,2550 1510.46,2550 1608.46,2452 IC1.18
PIC_RF2: IC1.47 JP4.1 | length 961
  Top w10: IC1.47 2562,1953 3004.2,1510.8 JP4.1
PIC_RF8: IC1.48 JP4.2 | length 1032.7
  Top w10: IC1.48 2582,1967.09 2995.28,1553.8 3063.19,1553.8 3106.19,1510.8 JP4.2
PIC_RF12: IC1.39 JP6.1 | length 753.6
  Top w10: IC1.39 2405,1545.61 JP6.1
PIC_RF13: IC1.38 JP5.2 | length 759.3
  Top w10: JP5.2 2338.8,1568.8 2385,1615 IC1.38
PIC_RG2: IC1.50 JP3.2 | length 1210
  Top w10: IC1.50 2621,1979 3005,1595 3300,1595 3342.8,1552.2 JP3.2
PIC_RG3: IC1.49 JP3.1 | length 1121
  Top w10: IC1.49 2602,1972.54 2997.54,1577 3102.06,1577 3109.06,1570 3205,1570 3242.8,1532.2 JP3.1
PIC_RG9: I/OS2.1 IC1.13 | length 980.4
  Top w10: I/OS2.1 1403.2,2856.8 1425,2835 1425,2725.46 1640.27,2510.19 1985.19,2510.19 2025,2550 IC1.13
PWM1_H: IC1.94 PWM_CON.2 | length 1311.6
  Top w10: PWM_CON.2 1396.2,3568.8 1507,3458 1507,3363.46 1859.46,3011 2138.88,3011 2267,2882.88 IC1.94
PWM1_L: IC1.93 PWM_CON.1 | length 1427.3
  Top w10: PWM_CON.1 1401.2,3668.8 1525,3545 1525,3370.91 1705.72,3190.19 1992.77,3190.19 2287,2895.96 IC1.93
PWM2_H: IC1.99 PWM_CON.4 | length 1085.8
  Top w10: PWM_CON.4 1441.65,3368.8 1835.46,2975 2095.46,2975 2167.5,2902.96 2167.5,2850.5 IC1.99
PWM2_L: IC1.98 PWM_CON.3 | length 1150.4
  Top w10: PWM_CON.3 1376.2,3468.8 1852,2993 2102.91,2993 2188,2907.91 IC1.98
PWM3_H: IC1.3 PWM_CON.6 | length 931.9
  Top w10: PWM_CON.6 1590.74,3168.8 1985.73,2773.81 2025.3,2773.81 2052.12,2747 IC1.3
PWM3_L: IC1.100 PWM_CON.5 | length 1021.6
  Top w10: PWM_CON.5 1516.2,3268.8 1830,2955 2090,2955 2149,2896 IC1.100
PWM4_H: IC1.5 PWM_CON.8 | length 928.8
  Top w10: PWM_CON.8 1393.8,2968.8 1470,3045 1662.81,3045 1970,2737.81 2009.47,2737.81 2040.28,2707 IC1.5
PWM4_L: IC1.4 PWM_CON.7 | length 898.8
  Top w10: PWM_CON.7 1665.28,3068.8 1978.28,2755.81 2016.92,2755.81 2045.73,2727 IC1.4
UART1_RX: IC1.76 U$2.P$12 | length 520.4
  Top w10: U$2.P$12@2620,3370 2621,3369 IC1.76
UART1_TX: IC1.77 U$2.P$11 | length 526.5
  Top w10: U$2.P$11 2596,3339 2602,3333 IC1.77
UART2_RX: IC1.79 U$2.P$9 | length 526
  Top w10: U$2.P$9@2545,3369 2545,3335 2562,3318 IC1.79
UART2_TX: IC1.78 U$2.P$10 | length 523.6
  Top w10: U$2.P$10@2571,3369 2571,3334.46 2582,3323.46 IC1.78
VDD_RADIO: C7.1 C15.1 C16.2 Q1.3 R3.2 R4.2 U1.10 | length 801.4
  Bottom w10: C7.1 2992.56,3118.78 2986.34,3125 2986.34,3130.72 3279.28,3130.72 3287.56,3122.44 R4.2 C15.1 ; v1(3225,2255) R3.2 ; U1.10 3442.44,3033.9 C15.1 ; C16.2 C15.1
VPIC: C8.2 C9.2 C10.2 C11.2 C12.2 C13.2 C14.2 C?.2 IC1.2 IC1.16 IC1.30 IC1.37 IC1.46 IC1.62 IC1.86 R11.1 R15.2 | length 853.8
  Top w10: C12.2 2104.06,2827.44 2127,2804.5 ; IC1.16 2119,2491 2130,2480 v1(2180,2480) ; IC1.2 2085,2767.5 2119.38,2767.5 2127,2775.12 2127,2804.5 ; R11.1@2424,3018.56 R11.1 C8.2 C14.2 2424,2913.56 IC1.86 2424,2814 2414.5,2804.5 2127,2804.5
  Bottom w10: C11.2 2172.44,2467.44 2180,2475 v1(2180,2480)
Z\B\_\3\V\3\_\E\N\: IC1.74 R8.2 R12.2 | length 594
  Top w10: IC1.74 2685.5,2767.5 2719.38,2767.5 2730,2778.12 2730,3145 v1(2740,3155)
  Bottom w10: v1(2740,3155) 2777.56,3155 R12.2 2780,3195 2810,3225 R8.2
Z\B\_\C\S\: IC1.73 R4.1 U1.8 | length 803.3
  Top w10: IC1.73 2916.54,2747 3015,2845.46 v1(3015,2920)
  Bottom w10: v1(3015,2920) 3020,2920 3070,2970 3215,2970 3230,2985 U1.8 3232.44,3023.9 R4.1
Z\B\_\I\N\T\: IC1.59 R3.1 U1.4 | length 855.8
  Top w10: IC1.59 2734,2471 2965,2240 v1(3145,2240)
  Bottom w10: v1(3145,2240) 3164.81,2220.19 3327.56,2220.19 R3.1 3330,2257.44 U1.4
Z\B\_\R\E\S\E\T\: IC1.57 R13.2 U1.2 | length 1140.6
  Top w10: IC1.57 2717.88,2432 2952.88,2197 v1@3567,2197
  Bottom w10: U1.2 3530,2260 3542.44,2247.56 3570,2247.56 v1(3570,2200)
ZB_SPI_MISO: IC1.72 R10.1 | length 674.4
  Top w10: IC1.72 2922,2727 3045,2850 v1(3045,3025)
  Bottom w10: v1(3045,3025) 3045,3067.56 R10.1
ZB_SPI_MOSI: R21.2 U1.5 | length 319.1
  Top w10: R21.2 3005,2275 v1(3185,2275)
  Bottom w10: v1(3185,2275) 3185,2280 3200,2295 U1.5@3200,2343.54
ZB_SPI_SCK: R20.2 U1.6 | length 126.7
  Top w10: R20.2@2994.49,2345.51 3009.49,2345.51 3025,2330 v1@3025,2320
  Bottom w10: v1(3030,2320) 3076.46,2320 U1.6@3100,2343.54
ZB_WAKE: IC1.58 U1.3 | length 929.3
  Top w10: IC1.58 2723.34,2452 2959.49,2215.85 3380.85,2215.85 3400,2235 v1(3400,2260)
  Bottom w10: v1(3400,2260) U1.3@3400,2343.54
pads on no net: H1.1 H2.1 H3.1 H4.1 IC1.55 IC1.56 IC1.66 IC1.67 IC1.68 IC1.69 IC1.70 IC1.71 IC1.80 IC1.85 IC1.87 IC1.88 IC1.89 IC1.90 IC1.91 IC1.92 IC1.95 IC1.96 IC1.97 IC2.5 IC4.5 U1.9 U2.2 U2.15

## Keep-outs
Keep-Out Layer:
  lines w16: 1000,1000 1000,4149.8 4149.8,4149.8 4149.8,1000 1000,1000

## Silkscreen, mask and mechanical layers (free items; w line width, h text height)
Dimension:
  lines w16: 1000,1000 1000,4149.8 4149.8,4149.8 4149.8,1000 1000,1000 ; 1196.85,1196.85 1196.85,3952.8 3952.8,3952.8 3952.8,1196.85 1196.85,1196.85
Unrouted:
  lines w0: 1304.8,1488.8 1437.8,1408.8 1537.8,1408.8 1637.8,1409.8 1737.8,1409.8 1838.8,1409.8 1938.8,1409.8 2038.8,1410.8 2138.8,1410.8 2238.8,1409.8 2338.8,1409.8 2439.8,1410.8 ; 1332.8,1843.8 1561.07,1787.07 1562.07,1687.07 ; 1437.8,1308.8 1486.8,1943.8 ; 1637.8,1309.8 1736.8,1308.8 ; 1807.31,3436.8 1938.8,3425.8 ; 1870.8,3545.8 1870.8,3616.8 ; 1893.23,3784.8 2088.8,3622.8 2237.8,3622.8 ; 1937.12,2571.8 1978.8,3212.8 ; 2051.8,3341.8 2138.8,3416.8 2187.8,3416.8 2237.8,3622.8 ; 2069.49,2452.49 2115.49,2190.49 ; 2081.8,2465.8 2228.12,2505.8 2540.12,2583.8 2874.8,2460.8 ; 2091.49,3261.8 2137.8,3416.8 ; 2274.8,2185.8 2522.8,2023.8 ; 2320.8,2485.8 2579.8,2583.8 ; 2334.8,2165.8 2417.8,1981.8 ; 2417.8,1924.8 2554.8,1924.8 ; 2417.8,1978.8 2554.8,1959.8 ; 2436.8,1924.8 2535.8,1924.8 2712.8,1924.8 ; 2439.49,1826.8 2439.8,1410.8 ; 2589.8,3870.8 2602.8,3706.8 ; 2672.8,1924.8 2741.8,1509.8 ; 2733.8,1985.8 2798.8,2204.8 ; 2799.8,3442.8 2869.8,3707.8 2602.8,3706.8 ; 2874.8,2204.8 2933.8,2219.12 ; 2874.8,2224.8 3026.8,2206.49 3180.8,2112.64 ; 2874.8,2244.8 3026.8,2296.49 3180.8,2466.97 ; 2874.8,2303.8 3316.8,2220.8 ; 2874.8,2322.8 3216.8,2220.8 ; 2874.8,2342.8 3034.8,2365.12 3116.8,2220.8 ; 2874.8,2362.8 2945.8,2362.8 ; 2874.8,2381.8 2946.8,2404.8 ; 2874.8,2401.8 2877.8,3028.8 ; 2916.8,2220.8 2985.8,2404.8 ; 2984.8,2362.8 3016.8,2220.8 ; 3034.8,2404.49 3216.8,2920.8 ; 3399.8,2151.8 3026.8,2167.12 3026.8,2257.12 2933.8,2258.49 2874.8,2263.8 2874.8,2460.8 ; 3416.8,2220.8 3452.8,2149.8 ; 3416.8,2920.8 3316.8,2920.8 2874.8,2460.8 ; 3543.8,1411.8 3443.8,1411.8 3342.8,1411.8 3242.8,1411.8 3142.8,1410.8 3042.8,1410.8 2941.8,1408.8 2841.8,1408.8 2741.8,1409.8 2641.8,1409.8 2539.8,1410.8 2439.8,1410.8 ; 2237.8,3622.8 2602.8,3706.8

## Text inside footprints (layer, text, board x,y; h text height)
I/OS2: tNames ">NAME" at 1400.8,2909.8 h77.5 r270; tValues ">VALUE" at 1203.8,2906.8 h77.5 r270
IC1: tNames ">NAME" at 2272,2525 h77.5; tNames ">NAME" at 2272,2525 h77.5; tNames ">NAME" at 2272,2525 h77.5; tValues ">VALUE" at 2249,2425 h77.5
IC2: bNames ">NAME" at 2372.5,3390 h77.5 r270; bValues ">VALUE" at 2107,3390 h77.5 r270
IC4: tNames ">NAME" at 2157.5,3390 h77.5 r90; tValues ">VALUE" at 2423,3390 h77.5 r90
JP1: tNames ">NAME" at 3618.8,1561.8 h77.5 r270; tValues ">VALUE" at 3318.8,1561.8 h77.5 r270
JP2: tNames ">NAME" at 3818.8,1562.8 h77.5 r270; tValues ">VALUE" at 3518.8,1562.8 h77.5 r270
JP3: tNames ">NAME" at 3417.8,1561.8 h77.5 r270; tValues ">VALUE" at 3117.8,1561.8 h77.5 r270
JP4: tNames ">NAME" at 3217.8,1560.8 h77.5 r270; tValues ">VALUE" at 2917.8,1560.8 h77.5 r270
JP5: tNames ">NAME" at 2413.8,1559.8 h77.5 r270; tValues ">VALUE" at 2113.8,1559.8 h77.5 r270
JP6: tNames ">NAME" at 2614.8,1560.8 h77.5 r270; tValues ">VALUE" at 2314.8,1560.8 h77.5 r270
JP7: tNames ">NAME" at 2816.8,1559.8 h77.5 r270; tValues ">VALUE" at 2516.8,1559.8 h77.5 r270
JP8: tNames ">NAME" at 3016.8,1558.8 h77.5 r270; tValues ">VALUE" at 2716.8,1558.8 h77.5 r270
JP9: tNames ">NAME" at 1612.8,1558.8 h77.5 r270; tValues ">VALUE" at 1312.8,1558.8 h77.5 r270
JP10: tNames ">NAME" at 1812.8,1559.8 h77.5 r270; tValues ">VALUE" at 1512.8,1559.8 h77.5 r270
JP11: tNames ">NAME" at 2013.8,1559.8 h77.5 r270; tValues ">VALUE" at 1713.8,1559.8 h77.5 r270
JP12: tNames ">NAME" at 2213.8,1560.8 h77.5 r270; tValues ">VALUE" at 1913.8,1560.8 h77.5 r270
PROG1: Top Overlay "5" at 1357.8,2103.8 h77.5 r90; Top Overlay "1" at 1357.8,1548.8 h77.5 r90; tNames ">NAME" at 1267.8,1593.8 h77.5 r90; tValues ">VALUE" at 1267.8,1843.8 h77.5 r90
PWM_CON: tNames ">NAME" at 1399.8,3721.8 h77.5 r270; tValues ">VALUE" at 1202.8,3718.8 h77.5 r270
UART1: Bottom Overlay "3" at 2725,3925 h77.5 r180; Bottom Overlay "1" at 2475,3925 h77.5 r180; Bottom Overlay ">value" at 2525,3925 h77.5 r180
UART2: Top Overlay "3" at 2725,3725 h77.5; Top Overlay "1" at 2475,3725 h77.5; Top Overlay ">value" at 2525,3725 h77.5
X6: Top Overlay "2" at 1762,3815 h77.5; Top Overlay "1" at 1566.57,3815 h77.5; tNames ">NAME" at 1593.57,3593 h77.5